# Altium PCB WIFI0320DD.PCBDOC (part 1 of 3)
Units mm, origin at the board's own origin, x right, y up, seen from the top; angles counter-clockwise.
Board outline 65.79 x 83.95 mm, 2 copper layers (Top Layer, Bottom Layer); 37 components, 30 nets, 200 pads, 45 vias.
Unrouted connection lines stored in the file: 2.
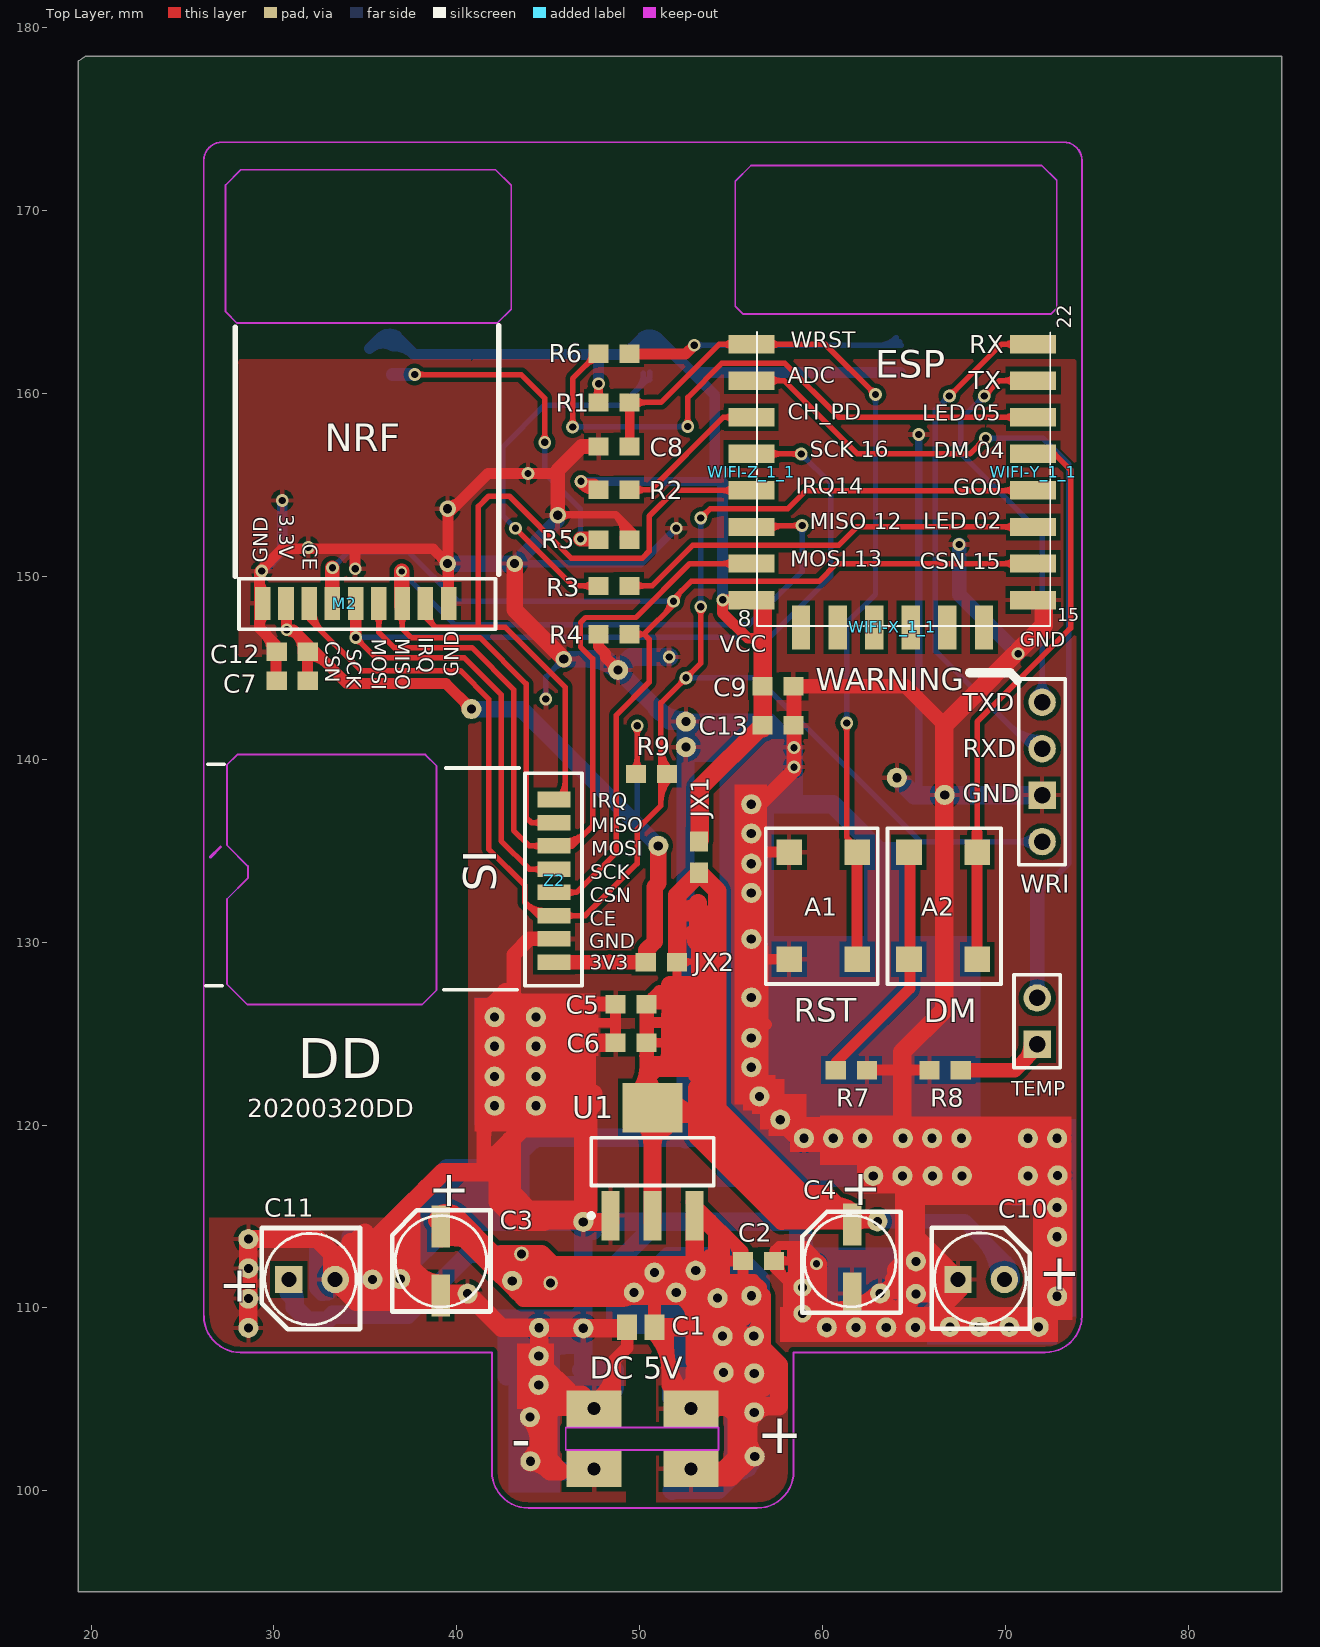
[diagram p0: Top Layer view]
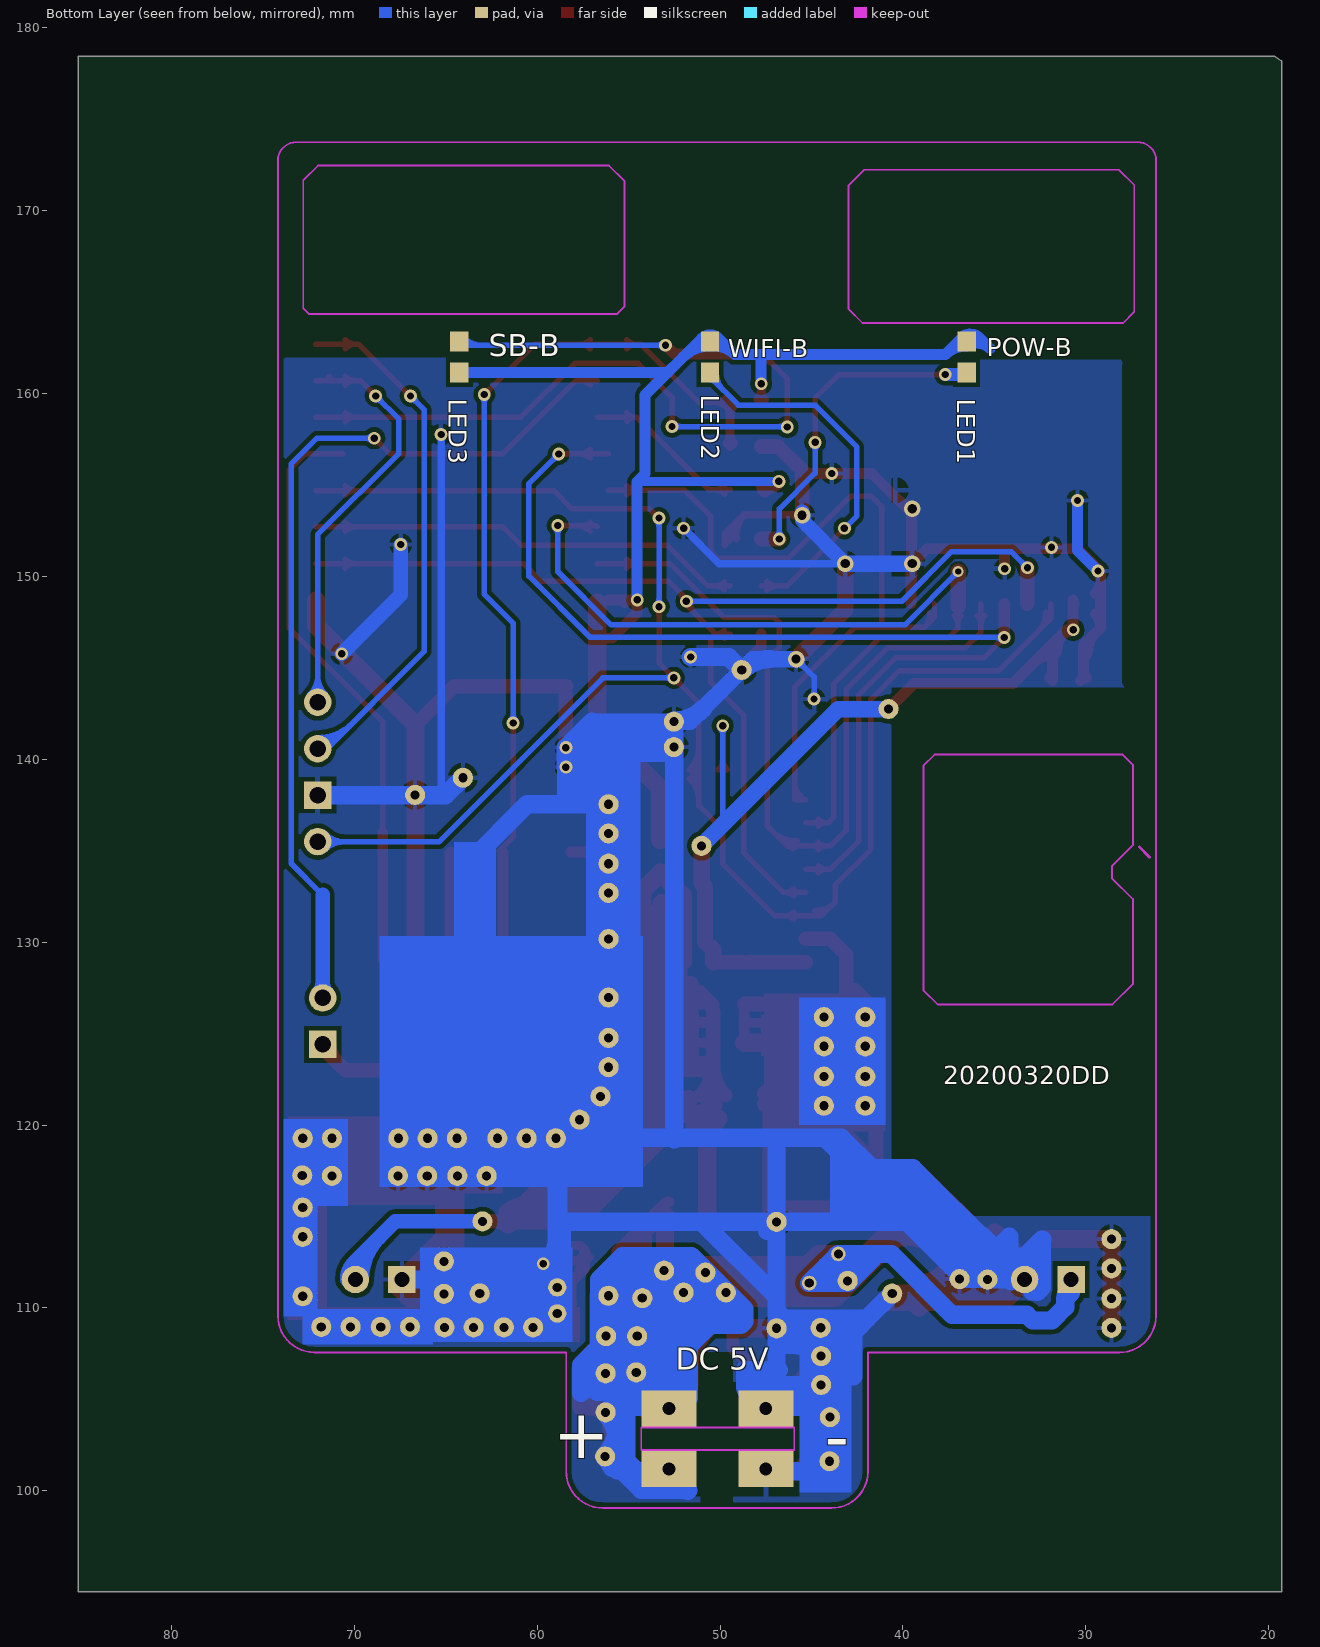
[diagram p1: Bottom Layer view, seen from below]

## Layer stack, top to bottom
Top Layer: signal copper 0.0356
Dielectric: dielectric 0.32, FR-4, Dk 4.8
Bottom Layer: signal copper 0.0356

## Board outline
19.685,178.435 85.09,178.435 85.09,94.488 19.304,94.488 19.304,178.181

## Design rules (kind name [scope] priority, off if disabled: settings)
Clearance [All] p1: gap=0.254
FabricationTestPointUsage TestPointUsage [All] p1: valid=0 allowmultiple=FALSE
FabricationTestpoint Testpoint [All] p1: side=3 testpointundercomponent=TRUE minsize=1.016 maxsize=2.54 preferedsize=1.524 minholesize=0 maxholesize=1.016 preferedholesize=0.813 testpointgrid=0.025 allowsidetop=TRUE allowsidebottom=TRUE usegrid=TRUE gridtolerance=0
PolygonConnect [All] p1: connectstyle=Relief reliefconductorwidth=0.254 reliefentries=4 polygonreliefangle="90 Angle"
RoutingVias [All] p1: holewidth=0.46 width=0.7 viastyle="Through Hole" minholewidth=0.4 minwidth=0.7 maxholewidth=0.8 maxwidth=1
SilkscreenOverComponentPads [All] p1: minsilkscreentomaskgap=0.254
SolderMaskExpansion [All] p1: expansion=0.102
Width Width_1 [InNet('3.3V')] p1: maxlimit=1 minlimit=0.254 preferedwidth=0.5 minimp=50.000000 maximp=50.000000 favimp=50.000000
Width Width_7 [InNet('3V3')] p2: maxlimit=1 minlimit=0.254 preferedwidth=0.39 minimp=50.000000 maximp=50.000000 favimp=50.000000
Width Width_4 [InNet('GND')] p3: maxlimit=1 minlimit=0.254 preferedwidth=0.6 minimp=50.000000 maximp=50.000000 favimp=50.000000
Width Width_3 [InNet('5V')] p4: maxlimit=1 minlimit=0.254 preferedwidth=1 minimp=50.000000 maximp=50.000000 favimp=50.000000
Width [All] p5: maxlimit=1 minlimit=0.254 preferedwidth=0.3 minimp=50.000000 maximp=50.000000 favimp=50.000000
25 further rules are at their usual default settings.

## Components (designator, comment, footprint, x,y, rotation, side; value= is the part's Value field where it differs from the comment)
A1 "WRST" HDR2X2 60.706,132.41 r90 top locked
A2 "WRST" HDR2X2 67.259,132.41 r90 top locked
C1 "10uf" C0805 50.063,108.941 r0 top (schematic designator C6)
C2 "0.1uf" CR1608-0603 56.5,112.573 r0 top (schematic designator C3)
C3 "220uf" CC3216-1206 39.5,113.9 r270 top locked (schematic designator C6)
C4 "220uf" CC3216-1206 62,114 r270 top locked (schematic designator C3)
C5 "10uf" CR1608-0603 49.53,126.6 r180 top locked
C6 "0.1uf" CR1608-0603 49.53,124.5 r180 top (schematic designator C4)
C7 "0.01uf" CR1608-0603 31,145.872 r0 top
C8 "0.1uf" CR1608-0603 48.6,157.1 r180 top
C9 "0.1" CR1608-0603 57.556,143.993 r0 top
C10 "220uf" HDR1X2#1 67.4,111.557 r0 top locked (schematic designator C6)
C11 "220uf" HDR1X2#1 30.81,111.557 r0 top locked (schematic designator C6)
C12 "0.01uf" CR1608-0603 31,144.297 r0 top
C13 "0.01uf" CR1608-0603 57.556,141.859 r0 top
JX1 "" CR1608-0603 53.238,134.645 r270 top (schematic designator C4)
JX2 "" CR1608-0603 51.181,128.905 r180 top (schematic designator C4)
LED1 "POW-B" CR1608-0603 36.52,162 r90 bottom locked
LED2 "WIFI-B" CR1608-0603 50.55,162 r90 bottom
LED3 "SB-B" CR1608-0603 64.26,162 r270 bottom
M2 "NRF24L01" MHDR1X8#1 38.278,148.513 r180 top locked
R1 "10K" CR1608-0603 48.6,159.512 r180 top
R2 "10K" CR1608-0603 48.6,154.737 r180 top
R3 "470" CR1608-0603 48.6,149.479 r0 top
R4 "10K" CR1608-0603 48.6,146.837 r0 top
R5 "470" CR1608-0603 48.6,152 r0 top
R6 "470" CR1608-0603 48.6,162.179 r0 top
R7 "4.7K" CR1608-0603 61.57,123 r180 top
R8 "4.7K" CR1608-0603 66.7,123 r180 top
R9 "10K" CR1608-0603 50.648,139.192 r0 top
TEMP "" HDR1X2#2 71.73,124.409 r90 top
U1 "AMS1117-3.3" SOT223_M 50.698,118 r90 top locked (schematic designator U4)
WIFI-X_1_1 "" MHDR1X8#2 59.359,147.215 r0 top
WIFI-Y_1_1 "" MHDR1X8#3 71.504,162.695 r270 top
WIFI-Z_1_1 "" MHDR1X8#4 56.106,162.691 r270 top locked
Z2 "SI" MHDR1X8#1 45.314,137.8 r270 top
? "" HDR1X4 72,135.5 r90 top

## Footprints (in the part's own frame and the unit in brackets; to place one, negate y for a bottom-side part, rotate by r counter-clockwise, add the part's x,y. Pads: shape width x height; smd on the part's side, far side on the other; paste and mask are expansions set on the pad)
C0805 [mm] "Chip Capacitor, Body 2.0x1.3mm, IPC High Density"
  rect 1.1x1.4 smd: 1(-0.75,0) 2(0.75,0)
  body extent -1.1,-0.72 1.1,0.72, height 1.4
CC3216-1206 [mm]
  rect 2.3x1 smd: 1(-0.562,-0.386) 2(3.213,-0.386)
CR1608-0603 [mm]
  rect 1.1x1 smd: 1(-0.85,0) 2(0.85,0)
HDR1X2#1 [mm]
  rect 1.5x1.5 hole 0.82: 1(0,0)
  round 1.5 hole 0.82: 2(2.54,0)
HDR1X2#2 [mm] "Connector; Header; 2 Position"
  rect 1.5x1.5 hole 0.9: 1(0,0)
  round 1.5 hole 0.9: 2(2.54,0)
  silkscreen extent -1.27,-1.27 3.81,1.27
HDR1X4 [mm] "Connector; Header; 4 Position"
  round 1.5 hole 0.9: 1(0,0) 3(5.08,0) 4(7.62,0)
  rect 1.5x1.5 hole 0.9: 2(2.54,0)
  silkscreen extent -1.27,-1.27 8.89,1.27
HDR2X2 [mm] "Connector; Header; 2x2 Position"
  rect 1.4x1.4 smd: 1(-3.344,-1.186) 2(-3.344,2.54) 3(2.508,-1.186) 4(2.508,2.54)
  silkscreen extent -4.7,-2.31 3.81,3.81
MHDR1X8#1 [mm] "Connector; Header; 8 Position"
  rect 0.85x1.8 smd: 1(0,0) 2(1.27,0) 3(2.54,0) 4(3.81,0) 5(5.08,0) 6(6.35,0) 7(7.62,0) 8(8.89,0)
  silkscreen extent -3.84,-1.37 10.19,1.4
MHDR1X8#2 [mm] "Connector; Header; 8 Position"
  rect 1x2.4 smd: 9(-0.54,0) 10(1.46,0) 11(3.46,0) 12(5.46,0) 13(7.46,0) 14(9.46,0)
MHDR1X8#3 [mm] "Connector; Header; 8 Position"
  rect 1x2.5 smd: 15(13.993,0) 16(11.993,0) 17(9.993,0) 18(7.993,0) 19(5.993,0) 20(3.993,0) 21(1.993,0) 22(0,0)
MHDR1X8#4 [mm] "Connector; Header; 8 Position"
  rect 1x2.5 smd: 1(0,0) 2(1.989,0) 3(3.989,0) 4(5.989,0) 5(7.989,0) 6(9.989,0) 7(11.989,0) 8(13.99,0)
SOT223_M [mm] "SOT223, 4-Leads, Body 6.5x3.5mm, Pit"
  rect 2.7x1 smd: 1(-2.95,2.3) 2(-2.95,0) 3(-2.95,-2.3)
  rect 2.7x3.3 smd: 4(2.95,0)
  silkscreen extent -3.07,-3.35 1.3,3.47, body extent -1.85,-3.35 1.85,3.35, height 1.7

## Part data
C1: library part Res3, "Resistor"
C2 C6 JX1 JX2: library part Ca
C10 C11: library part "Cap Pol1", "Polari"
U1: library part QNPN, "NPN Bipolar Transistor"

## Free pads (board coordinates)
  rect 0.85x1.8 smd: 0(39.55,148.513)
  rect 3x2 hole 0.7: 1(47.5,101.2) 1(47.5,104.5) 1(52.8,101.2) 1(52.8,104.5)
  round 1.1 hole 0.5: 5(35.382,111.557) 5(36.906,111.582) 5(40.589,110.787) 5(44.475,105.791) 5(44.475,107.366) 5(44.499,108.915) 5(62.992,114.732) 5(63.144,110.795) 5(65.1,110.769) 6(28.6,110.514) 6(28.6,113.765) 6(40.792,142.748) 6(42.062,122.655) 6(42.062,125.907) 6(44.323,122.655) 6(44.323,125.907) 6(46.914,108.89) 6(46.914,114.706) 6(51.016,135.268) 6(52.527,140.665) 6(56.1,124.764) 6(56.1,130.174) 6(56.1,132.691) 6(56.1,135.942) 6(60.225,108.941) 6(62.179,119.278) 6(62.765,117.221) 6(63.476,108.941) 6(65.1,112.549) 6(66.016,117.221) 6(66.675,138.049) 6(66.956,108.966) 6(67.589,119.278) 6(70.207,108.966) 6(71.221,117.221) 6(72.821,119.278) 6(72.822,115.493) 7(28.6,108.914) 7(28.6,112.165) 7(42.062,121.055) 7(42.062,124.307) 7(44.323,121.055) 7(44.323,124.307) 7(48.819,144.882) 7(52.527,142.062) 7(56.1,123.164) 7(56.1,134.291) 7(56.1,137.542) 7(60.579,119.278) 7(61.825,108.941) 7(64.059,138.99) 7(64.365,117.221) 7(65.076,108.941) 7(65.989,119.278) 7(67.616,117.221) 7(68.556,108.966) 7(71.221,119.278) 7(71.807,108.966) 7(72.822,110.641) 7(72.822,113.893) 7(72.847,117.246) 8(43.028,111.481) 8(43.993,104.032) 8(44.018,101.619) 8(49.682,110.846) 8(50.8,111.938) 8(51.994,110.846) 8(53.061,112.039) 8(54.254,110.541) 8(54.534,108.458) 8(54.585,106.477) 8(56.1,126.974) 8(56.109,110.668) 8(56.236,108.458) 8(56.261,104.292) 8(56.261,106.426) 8(56.286,101.879) 8(56.54,121.564) 8(57.683,120.294) 8(58.979,119.278) 8(64.389,119.278)
  round 0.8 hole 0.5: 5(43.534,112.954) 5(45.124,111.363)
  round 1 hole 0.5: 5(58.903,109.703) 5(58.903,111.125)

## Via types
v1: diameter 0.7, hole 0.4, Top Layer to Bottom Layer, 39 vias
v2: diameter 0.9, hole 0.5, Top Layer to Bottom Layer, 5 vias
v3: diameter 0.6, hole 0.35, Top Layer to Bottom Layer, 1 vias

## Nets (pads, with @x,y where several pads share a name; then routed paths per layer and width w, separated by ;. In a path a pad name is that pad's centre, name@x,y a point inside that pad or via, vN(x,y) a via of type N, cw(c..) or ccw(c..) an arc to the next point about the centre after c; other vN are vias at no path point)
3V: 
3V3: C4.1 C5.1 C6.1 C7.2 C9.1 C10.2 C12.2 C13.1 JX1.1 JX1.2 JX2.1 JX2.2 LED1.2 LED2.2 LED3.2 M2.7 pad.5@62.992,114.732 pad.6@40.792,142.748 pad.6@51.016,135.268 R1.2 R2.2 R9.1 U1.2 U1.4 WIFI-Z_1_1.8 Z2.8 | length 326.9
  Top Layer w0.3: R9.1@49.6,139.439 ccw(c48.972,140.067) 49.86,140.067 ; v1@49.719,141.692 cw(c49.377,141.351) 49.86,141.351 cw(c50.343,141.351) v1@50.002,141.692 ; R9.1@49.86,139.255 v1(49.86,141.834) ; 49.86,140.007 ccw(c50.662,140.007) R9.1@50.095,139.439 ; C5.1@50.421,126.467 51.343,126.467 ; C5.1@50.678,126.353 cw(c50.953,126.077) 50.953,126.467 ; C5.1@50.712,126.807 ccw(c51.384,127.3) 51.384,126.467 51.343,126.467 ; 51.277,126.533 51.146,126.533 50.729,126.949 51.343,126.949 ; 51.343,125.894 51.343,126 ; 51.343,127.178 51.343,126.949 ; 51.664,123.971 51.765,123.971 52.003,123.971 ; 51.756,126 51.664,126 51.343,126 ; JX2.1@51.905,129.208 ccw(c51.55,129.819) 52.257,129.819 JX2.1@52.257,128.94 ; 52.031,127.66 52.031,127.215 51.765,126.949 51.343,126.949 ; JX2.1@52.045,128.94 JX2.1@52.257,128.94 ; JX2.1@52.197,128.753 52.257,128.813 JX2.1@52.257,128.94 ; 52.257,127.139 52.257,127.66 ; JX2.1@52.329,128.658 cw(c53.01,127.976) 53.01,128.94 ; JX2.1@52.329,129.152 ccw(c52.842,129.666) 52.842,128.94 ; 53.328,128.94 53.289,128.94 JX2.1@52.257,128.94 ; 51.343,126 51.343,126.467 ; 51.343,126.467 51.343,126.949
  Top Layer w0.39: 50.164,123.784 cw(c49.644,123.264) 50.38,123.264 cw(c51.116,123.264) 50.596,123.784 ; C13.1@56.541,142.075 ccw(c56.079,142.536) 56.732,142.536 ; C9.1@56.541,143.777 cw(c56.079,143.316) 56.732,143.316 ; C9.1@56.541,144.208 ccw(c56.079,144.67) 56.732,144.67 ; 56.706,145.213 56.706,146.618 56.706,148.577 WIFI-Z_1_1.8@56.706,148.701 ; 56.706,147.602 cw(c57.955,147.602) WIFI-Z_1_1.8@57.072,148.485 ; 56.706,145.212 56.718,145.2 56.732,145.186 C13.1@56.732,141.884 ; 56.732,142.655 ccw(c57.552,142.655) C13.1@56.972,142.075 ; 56.732,143.197 cw(c57.552,143.197) C9.1@56.972,143.777 ; 56.732,144.788 ccw(c57.552,144.788) C9.1@56.972,144.208 ; C4.1@61.315,114.503 ccw(c61.036,114.448) 61.036,114.732 61.444,114.732 61.614,114.732 62.265,114.732 ; C4.1@61.904,114.469 cw(c62.265,114.353) 62.265,114.732 ; pad.5@62.712,114.514 ccw(c62.265,114.166) 62.265,114.732 ; pad.5@62.712,114.95 cw(c62.265,115.298) 62.265,114.732 ; pad.5@62.741,114.481 ccw(c62.135,113.875) 62.135,114.732 ccw(c62.135,115.589) pad.5@62.741,114.983
  Top Layer w0.5: R2.2@47.496,154.991 R2.2@47.75,154.737 ; R1.2@47.573,159.689 ccw(c47.17,160.092) 47.74,160.092 ; R1.2@47.74,159.512 v1@47.74,160.477 ; 47.74,160.139 ccw(c48.377,160.139) R1.2@47.927,159.689 ; C6.1@50.38,124.5 51.324,124.5 ; 50.405,123.535 51.349,123.535 ; C6.1@50.607,124.323 cw(c51.034,123.896) 51.034,124.5 cw(c51.034,125.104) C6.1@50.607,124.677 ; 52.031,127.66 JX2.1@52.031,128.905
  Top Layer w0.6: M2.7@30.658,148.513 M2.7@30.696,148.513 ; v1@30.696,147.029 cw(c30.696,146.049) 31.388,146.742 ; M2.7@30.696,148.704 M2.7@30.696,148.513 ; 31.135,146.996 cw(c30.011,145.872) C7.2@31.6,145.872 ; C12.2@31.838,144.297 C7.2@31.838,145.872 ; 31.838,144.809 ccw(c32.362,144.809) C12.2@31.991,144.439 ; 31.838,145.36 cw(c32.362,145.36) C7.2@31.991,145.731 ; C7.2@31.9,145.672 cw(c31.9,144.325) 32.853,145.278 ; pad.6@40.542,142.748 ccw(c39.939,142.748) 40.366,143.175 ccw(c40.792,143.602) pad.6@40.792,142.998 ; pad.6@40.792,142.748 39.395,144.145 33.985,144.145 31.071,147.059 30.715,147.059 v1(30.696,147.079) M2.7@30.696,148.513 ; 48.336,129.025 48.451,128.91 48.446,128.905 ; 50.292,125.603 50.38,125.603 51.576,125.603 ; U1.4@50.38,121.902 U1.4@50.698,120.603 ; JX2.1@52.031,128.905 JX2.1@52.041,128.905 ; v1@54.835,148.717 cw(c54.835,148.18) WIFI-Z_1_1.8@55.215,148.56 ; WIFI-Z_1_1.8@56.106,148.701 56.09,148.717 v1(54.534,148.717) 54.534,147.997 55.912,146.618 56.706,146.618 ; WIFI-Z_1_1.8@56.651,148.632 56.706,148.577 WIFI-Z_1_1.8@56.718,148.565 ; C9.1@56.706,143.993 56.706,145.212 56.706,146.618
  Top Layer w0.7: 47.085,154.965 cw(c47.212,155.439) v1(46.787,155.194) ; R2.2@47.277,154.991 cw(c47.277,155.685) v1(46.787,155.194) ; R2.2@47.496,154.991 v1@46.99,154.991 ; R2.2@47.571,154.66 ccw(c46.99,154.315) v1@46.99,154.991 ; R2.2@47.638,154.873 cw(c47.399,155.399) v1@46.99,154.991 ; R2.2@47.682,154.886 cw(c47.55,155.958) v1(46.787,155.194) ; C5.1@50.38,126.6 50.729,126.949 51.085,127.305 51.943,127.305 ccw(c51.943,125.689) C5.1@50.559,126.523 ; v1(46.787,155.194) v1@46.99,154.991
  Top Layer w0.8: Z2.8@45.314,128.91 48.336,128.91 ; 48.446,128.905 JX2.2@50.368,128.905 ; U1.4@49.727,121.622 ccw(c48.149,123.199) 50.38,123.199 ; U1.4@50.38,121.902 50.38,122.494 ; 50.38,123.288 ccw(c52.736,123.288) U1.4@51.07,121.622 ; C5.1@50.38,126.215 50.38,125.603 C6.1@50.38,124.5 50.38,123.199 ; C4.1@61.614,114.562 C4.1@61.614,114.732 ; pad.5@62.992,114.732 62.265,114.732 ; 50.38,122.494 50.902,123.016 52.581,123.016 53.137,123.571 53.264,123.698 ; 50.38,122.494 50.38,123.199 ; 53.264,123.698 53.264,123.952 53.467,124.155 53.594,124.028 53.264,123.698 ; 62.265,114.732 ccw(c62.265,113.911) 61.685,114.491 cw(c62.265,113.911) 62.265,114.732
  Top Layer w0.9: JX2.2@50.368,128.905 50.368,129.565 50.825,130.023 50.825,133.02 51.016,133.21 pad.6@51.016,135.268
  Top Layer w1: U1.4@50.097,120.349 cw(c48.646,118.898) 50.698,118.898 cw(c52.75,118.898) U1.4@51.299,120.349 ; U1.4@50.38,121.146 U1.4@50.876,120.65 ; U1.2@50.698,114.703 50.698,120.603 U1.4@51.384,120.603 ; U1.4@51.206,120.625 53.137,120.625 ; U1.4@51.384,119.888 U1.4@51.384,120.328 ; 51.638,123.749 51.664,123.774 ; 51.664,126 51.664,123.971 51.664,123.774 ; 51.664,127.66 52.031,127.66 52.257,127.66 53.264,127.66 ; U1.4@51.716,121.406 ccw(c53.137,122.307) 53.137,120.625 ; 51.765,126.949 51.765,123.971 51.765,123.876 51.664,123.774 ; JX2.1@52.045,128.94 52.045,132.563 JX1.2@53.238,133.756 ; 52.502,123.495 52.502,126.467 ; 52.578,126.902 52.705,126.775 ; 52.603,131.623 52.807,131.826 ; 52.68,127.279 52.934,127.533 ; 52.959,130.48 53.111,130.327 cw(c54.186,130.327) 53.835,131.343 ; 53.137,122.03 53.137,120.625 ; 53.188,130.023 53.188,130.073 ; 53.188,132.131 53.188,130.073 ; 53.264,123.698 54.242,122.72 ; JX1.2@53.277,133.795 JX1.2@53.258,133.776 ; JX1.1@53.277,135.585 53.277,138.43 C13.1@56.732,141.884 ; 53.289,121.196 53.289,122.758 ; 53.315,119.888 53.315,120.752 ; 53.391,122.758 53.289,122.758 ; 53.391,131.623 53.391,129.769 53.289,129.87 ; JX1.2@53.391,133.604 JX1.2@53.238,133.756 ; 53.594,124.028 53.594,128.956 ccw(c52.088,130.462) 54.218,130.462 ; 53.746,119.99 54.242,119.494 ; 56.236,116.484 57.937,114.783 61.835,114.783 C4.1@61.614,114.562 ; C13.1@56.718,141.693 56.718,145.2 WIFI-Z_1_1.8@56.718,148.565 ; 57.226,115.545 60.631,115.545 ; 57.772,114.77 53.137,119.405 53.137,120.625 ; 60.794,115.552 ccw(c61.614,116.371) C4.1@61.614,115.212 ; 61.081,114.783 cw(c61.081,114.03) C4.1@61.614,114.562 ; C4.1@61.614,114.732 60.115,116.23 58.89,116.23 ; 53.188,130.073 53.086,130.073 53.289,129.87 ; 53.188,130.073 53.289,130.073 53.289,129.87 ; JX1.2@53.238,133.756 JX1.2@53.238,133.795 JX1.2@53.258,133.776 ; JX1.2@53.238,133.756 JX1.2@53.258,133.776 ; JX1.2@53.258,133.776 54.242,132.792 54.242,122.72 ; 53.289,122.758 53.137,122.758 53.137,123.571 53.137,127.279 53.289,127.432 53.289,128.94 53.289,129.87 ; 54.242,119.494 54.242,120.879 ; 54.242,119.494 57.506,116.23 58.89,116.23 ; 54.242,120.879 58.89,116.23 ; 54.242,120.879 54.242,122.72 ; 60.631,115.545 ccw(c61.459,116.372) C4.1@61.614,115.212 ; 60.631,115.545 61.444,114.732 C4.1@61.614,114.562 ; C4.1@61.614,115.212 ccw(c60.811,114.409) 60.811,115.545 cw(c60.811,114.409) C4.1@61.614,115.212
  Bottom Layer w0.3: v1@49.719,141.692 cw(c49.377,141.351) 49.86,141.351 cw(c50.343,141.351) v1@50.002,141.692 ; v1(49.86,141.834) 49.86,136.423 pad.6@51.016,135.268
  Bottom Layer w0.39: C10.2@69.693,111.804 69.693,111.811 C10.2@69.698,111.811
  Bottom Layer w0.5: v1(46.787,155.194) 54.534,155.194
  Bottom Layer w0.6: v1@30.683,147.066 v1(30.696,147.079) v1@30.709,147.091 ; 35.792,163.021 cw(c36.339,162.474) LED1.2@36.714,163.15 ; 35.917,162.95 cw(c35.917,162.297) LED1.2@36.379,162.759 ; LED1.2@36.423,162.625 ccw(c35.937,161.751) 35.23,162.458 35.721,162.95 36.855,162.95 37.677,162.128 ; LED1.2@36.522,162.6 cw(c36.538,160.989) 37.677,162.128 ; v1@47.752,160.477 47.752,162.041 ; LED2.2@50.092,163.021 cw(c50.528,162.585) LED2.2@50.591,163.198 ; LED2.2@50.53,162.601 ccw(c50.362,160.966) 49.2,162.128 ; LED2.2@50.55,162.6 cw(c50.55,160.499) 52.036,161.985 ; LED2.2@50.55,163.2 cw(c50.55,162.547) LED2.2@51.012,163.009 ; 52.857,161.15 LED3.2@64.26,161.15 ; v1(54.534,148.717) 54.534,155.169 54.102,155.6 54.102,159.918 51.003,163.017 50.089,163.017 49.2,162.128 ; 37.677,162.128 49.2,162.128
  Bottom Layer w0.8: pad.5@62.992,114.732 67.767,114.732 69.94,112.559 C10.2@69.94,111.557 ; 68.634,113.865 cw(c66.326,111.557) C10.2@69.59,111.557 ; C10.2@69.693,111.804 ccw(c69.095,112.402) 69.94,112.402 ccw(c70.785,112.402) C10.2@70.188,111.804 ; 70,112.499 cw(c69.057,111.557) C10.2@70.39,111.557
  Bottom Layer w0.9: pad.6@40.792,142.748 43.536,142.748 pad.6@51.016,135.268
  other v1: 47.752,160.528
5V: C1.2 C2.1 C3.1 C11.1 pad.1@52.8,101.2 pad.1@52.8,104.5 pad.5@43.534,112.954 pad.5@45.124,111.363 pad.8@43.028,111.481 pad.8@49.682,110.846 pad.8@50.8,111.938 pad.8@51.994,110.846 pad.8@53.061,112.039 pad.8@54.254,110.541 pad.8@54.534,108.458 pad.8@54.585,106.477 pad.8@56.109,110.668 pad.8@56.236,108.458 pad.8@56.261,104.292 pad.8@56.261,106.426 pad.8@56.286,101.879 U1.3 | length 541.8
  Top Layer w0.5: 53.848,112.395 53.899,112.446 53.975,112.522 53.975,112.598 53.975,114.427 ; 54.178,111.709 54.356,111.887 ; 54.28,113.335 54.356,113.259 54.356,112.573 54.356,111.887 ; 54.635,111.836 54.521,111.722 ; 54.686,111.912 54.686,112.573 54.686,113.411 ; 54.712,113.69 54.712,113.767 ; 55.829,111.481 55.702,111.608 ; pad.8@56.015,110.953 ccw(c55.891,111.328) 56.286,111.328 ; 54.356,111.887 54.458,111.785 54.521,111.722 ; 54.521,111.722 54.635,111.608 ; 54.521,111.722 54.407,111.608 54.635,111.608 ; 54.635,111.608 55.65,111.608 55.702,111.608 ; 55.702,111.608 56.007,111.608 ; 56.007,111.608 56.261,111.608 56.718,111.15 56.718,110.768 56.63,110.68 56.286,111.023 56.286,111.328 ; 56.007,111.608 56.286,111.328
  Top Layer w0.6: U1.3@52.792,115.787 cw(c52.834,115.466) U1.3@53.063,115.695 ; U1.3@52.87,115.192 cw(c53.032,113.939) 53.925,114.832 ; U1.3@52.947,114.597 cw(c53.23,112.413) 54.788,113.97 ; pad.8@53.034,111.997 53.45,111.997 53.467,112.014 53.67,112.217 ; pad.8@53.162,112.268 ccw(c53.413,112.83) 53.848,112.395 53.67,112.217 ; U1.3@53.251,115.506 55.65,113.108 C2.1@55.65,112.573 ; 53.746,112.827 53.848,112.725 53.975,112.598 54.013,112.56 ; 53.772,112.573 53.848,112.497 53.899,112.446 54.127,112.217 ; 53.975,112.522 54.013,112.56 ; 54.026,112.547 54.013,112.56 ; pad.8@54.134,110.76 ccw(c53.668,111.608) 54.635,111.608 ; 54.458,111.785 54.458,112.293 ; 54.635,111.023 54.635,111.277 ; 54.635,112.09 54.635,111.836 54.635,111.608 ; 54.635,113.767 54.686,113.767 ; 54.813,113.589 54.839,113.614 ; 54.845,113.913 cw(c53.505,112.573) C2.1@55.4,112.573 ; 54.927,111.316 55.093,111.481 55.65,111.481 ; C2.1@55.575,112.928 C2.1@55.575,112.573 ; 55.702,109.31 cw(c57.186,109.31) pad.8@56.264,110.472 ; 55.702,111.608 55.702,111.481 ; C2.1@55.753,112.434 C2.1@55.753,112.573 ; pad.8@55.859,110.67 ccw(c55.146,110.676) 55.65,111.18 ; pad.8@55.86,110.691 ccw(c55.316,110.742) 55.702,111.128 ; pad.8@55.896,110.537 cw(c55.054,110.02) 55.752,109.322 ; pad.8@56.143,110.915 cw(c56.22,111.481) 55.65,111.481 ; pad.8@56.161,110.912 cw(c56.283,111.481) 55.702,111.481 ; 56.29,109.859 ccw(c55.72,110.429) pad.8@56.407,110.851 ; 56.63,110.2 55.752,109.322 ; 53.67,112.217 cw(c53.453,112.434) 53.237,112.217 ccw(c53.453,112.434) 53.67,112.217 ; 54.013,112.56 54.026,112.573 54.356,112.573 54.686,112.573 C2.1@55.575,112.573 ; 54.635,111.277 cw(c54.14,111.277) 54.216,110.788 ccw(c54.14,111.277) 54.635,111.277 ; 54.635,111.277 54.635,111.608 ; C2.1@55.575,112.573 C2.1@55.65,112.573 ; C2.1@55.575,112.573 55.397,112.751 C2.1@55.65,112.573 ; 55.65,111.18 55.65,111.481 ; 55.65,111.18 55.702,111.128 ; 55.65,111.481 55.702,111.481 ; 55.65,111.481 55.65,111.608 C2.1@55.65,112.573 ; 55.702,111.128 55.702,111.481 ; 55.702,111.128 55.702,110.211 55.702,109.372 55.752,109.322 ; 55.708,110.217 cw(c56.159,109.816) 56.123,110.418 ccw(c56.159,109.816) 55.708,110.217 ; 55.708,110.217 ccw(c55.257,110.618) 55.859,110.653 cw(c55.257,110.618) 55.708,110.217
  Top Layer w0.7: C1.2@50.672,108.649 cw(c48.585,106.562) 51.537,106.562 ; C1.2@50.813,108.941 50.813,110.667 ; C1.2@51.167,109.144 cw(c50.275,108.252) 51.537,108.252 ; 51.537,106.222 ccw(c54.022,106.222) pad.1@52.265,104.465 ; 51.537,107.912 ccw(c55.712,107.912) pad.1@52.76,104.96 ; 51.537,108.941 51.537,105.763 ; pad.1@51.711,104.775 ccw(c50.918,105.145) 51.537,105.763 ; pad.1@52.8,104.5 51.537,105.763
  Top Layer w1: C3.1@38.911,114.791 cw(c39.305,112.892) 40.676,114.264 ; C3.1@39.091,114.986 39.954,114.986 ; C3.1@39.114,113.812 cw(c39.755,110.723) 41.986,112.954 ; C3.1@39.114,114.462 C3.1@39.513,114.462 ; C3.1@39.114,115.112 cw(c39.449,114.48) 39.954,114.986 ; C3.1@39.116,113.97 40.259,113.97 41.275,112.954 ; 42.443,112.954 42.469,112.954 ; 42.465,111.764 ccw(c43.028,112.326) pad.8@43.028,111.531 ; pad.8@42.978,111.486 ccw(c41.21,111.695) 42.469,112.954 ; pad.8@43.028,111.431 cw(c43.028,109.102) 44.674,110.749 ; pad.8@43.078,111.481 ccw(c43.873,111.481) 43.311,110.918 ; pad.5@43.434,112.954 ccw(c45.763,112.954) 44.116,111.307 ; 43.477,111.945 ccw(c45.124,113.593) pad.5@45.124,111.263 ; pad.5@43.594,112.874 cw(c43.077,113.562) 42.469,112.954 ; pad.5@45.202,111.3 cw(c43.663,112.548) 43.663,110.566 ; 46.563,110.667 cw(c46.563,112.801) 45.054,111.292 ccw(c46.807,113.046) 46.807,110.566 ; 48.312,111.363 cw(c48.312,109.476) pad.8@49.647,110.81 ; 48.887,110.566 ccw(c48.887,111.641) 49.647,110.881 cw(c49.131,111.397) 49.131,110.667 ; 49.292,111.363 ccw(c49.292,113.446) pad.8@50.765,111.973 ; pad.8@49.641,110.873 cw(c49.073,111.245) 49.073,110.566 ; pad.8@49.679,110.796 ccw(c49.63,110.009) 49.073,110.566 ; 49.698,112.344 cw(c49.698,110.836) pad.8@50.765,111.902 ; pad.8@49.718,110.81 cw(c51.052,109.476) 51.052,111.363 ; pad.8@49.718,110.881 ccw(c50.233,111.397) 50.233,110.667 ; pad.8@49.732,110.849 cw(c50.495,110.894) 50.297,111.632 ; 50.624,111.363 cw(c50.624,109.476) pad.8@51.958,110.81 ; C1.2@50.813,108.941 51.537,108.941 53.01,108.941 ; 50.813,111.143 50.813,110.667 ; pad.8@50.835,111.902 cw(c51.902,110.836) 51.902,112.344 ; pad.8@50.835,111.973 ccw(c52.308,113.446) 52.308,111.363 ; 51.307,111.363 ccw(c51.307,113.793) pad.8@53.025,112.075 ; 51.336,111.624 cw(c51.123,110.831) pad.8@51.944,110.845 ; 51.443,110.667 ccw(c51.443,111.397) pad.8@51.958,110.881 ; pad.8@51.979,110.798 cw(c51.559,109.409) 53.01,109.409 ; pad.8@51.994,110.796 cw(c51.994,108.651) 53.51,110.168 ; pad.8@52.018,110.802 cw(c52.426,110.083) 53.01,110.667 ; pad.8@52.029,110.881 ccw(c52.545,111.397) 52.545,110.667 ; pad.8@52.036,110.819 cw(c53.01,110.219) 53.01,111.363 ; 52.204,112.344 cw(c52.204,111.183) pad.8@53.025,112.004 ; pad.1@52.376,105.024 52.299,105.024 52.299,104.5 pad.1@52.8,104.5 ; pad.1@52.446,104.854 ccw(c51.085,106.215) 53.01,106.215 ; pad.1@52.49,104.892 ccw(c51.637,105.969) 53.01,105.969 ; pad.1@52.511,105.126 52.511,105.131 52.629,105.131 52.553,105.207 52.534,105.207 pad.1@52.534,105.138 ; pad.1@52.8,104.6 pad.1@52.83,104.6 ; U1.3@52.998,115.05 53.352,115.05 53.975,114.427 54.635,113.767 ; U1.3@53.01,114.173 pad.8@53.01,112.014 ; U1.3@53.02,115.087 U1.3@53.289,115.087 ; pad.8@53.034,111.997 cw(c52.326,110.855) 53.67,110.855 ; 53.035,111.363 53.01,111.363 ; pad.8@53.089,111.998 cw(c53.656,111.187) 54.356,111.887 ; 53.248,108.941 cw(c53.248,107.172) 54.498,108.423 cw(c52.757,106.682) 55.22,106.682 ; 53.289,109.296 53.67,108.941 ; pad.1@53.631,104.875 ccw(c54.042,105.342) 54.483,104.902 ; 53.67,106.274 cw(c56.688,106.274) 54.569,108.422 ccw(c55.39,107.601) 54.229,107.601 ; 53.67,108.805 ccw(c56.913,108.805) 54.62,106.512 cw(c55.564,107.456) 54.229,107.456 ; 53.67,109.01 cw(c55.785,109.01) pad.8@54.29,110.505 ; 53.67,112.217 53.67,112.014 ; pad.1@53.782,104.368 cw(c54.483,104.175) 54.483,104.902 ; pad.1@53.788,104.393 cw(c54.864,104.156) 54.864,105.258 ; 53.848,112.725 53.848,112.497 53.848,112.395 54.356,111.887 ; pad.8@54.21,110.564 cw(c53.01,111.177) 53.01,109.83 ; pad.8@54.216,110.509 ccw(c53.67,110.068) 53.67,110.769 ; pad.8@54.224,110.581 cw(c53.667,111.324) 53.01,110.667 ; 54.229,109.315 ccw(c55.39,109.315) pad.8@54.569,108.493 ; pad.8@54.274,110.495 cw(c54.775,109.284) 55.702,110.211 ; pad.8@54.289,110.577 cw(c55.648,112.014) 53.67,112.014 ; pad.8@54.29,110.576 ccw(c55.172,111.459) 55.172,110.211 ; pad.8@54.304,110.541 ccw(c55.284,110.541) 54.591,109.848 ; pad.8@54.489,108.436 ccw(c53.67,108.024) 53.67,108.941 ; pad.8@54.49,108.481 ccw(c53.188,109.169) pad.8@54.229,110.211 ; pad.8@54.549,106.512 ccw(c52.931,108.131) 55.22,108.131 ; pad.8@54.553,108.504 cw(c55.107,109.83) 53.67,109.83 ; pad.8@54.58,106.527 cw(c54.406,108.457) 53.035,107.086 ; pad.8@54.585,106.427 cw(c54.585,105.202) 55.45,106.068 ; pad.8@54.585,106.527 ccw(c54.585,107.874) 55.537,106.921 ; 54.597,101.13 cw(c56.286,99.44) pad.8@56.286,101.829 ; pad.8@54.603,106.43 cw(c54.81,105.89) 55.22,106.299 ; pad.8@54.631,106.457 ccw(c55.637,106.03) 54.864,105.258 ; 54.884,110.211 ccw(c54.884,111.892) pad.8@56.073,110.703 ; 55.055,111.188 54.927,111.316 54.762,111.15 ; 55.22,106.344 cw(c57.799,106.344) pad.8@56.265,108.418 ; 55.296,101.841 cw(c58.712,101.841) pad.8@56.296,104.257 ; 55.569,104.629 ccw(c56.261,105.322) pad.8@56.261,104.342 ; 55.571,104.627 ccw(c53.998,106.2) pad.8@56.211,106.421 ; 55.702,111.128 56.63,110.2 ; pad.8@55.728,108.509 56.718,107.518 ; 55.855,105.562 cw(c56.85,105.562) pad.8@56.289,106.385 ; 55.931,102.859 ccw(c57.266,102.859) pad.8@56.322,101.915 ; 55.931,103.375 cw(c57.179,103.375) pad.8@56.296,104.257 ; pad.8@56.073,110.632 cw(c54.639,109.198) 56.667,109.198 ; pad.8@56.101,110.717 cw(c55.855,112.243) 54.762,111.15 ; pad.8@56.2,108.493 ccw(c55.072,109.621) 56.667,109.621 ; pad.8@56.214,108.413 cw(c55.865,107.69) 56.667,107.69 ; pad.8@56.218,104.266 ccw(c55.571,103.865) 55.571,104.627 ; pad.8@56.229,106.464 ccw(c55.339,107.518) 56.718,107.518 ; pad.8@56.24,106.381 cw(c55.89,105.63) 56.718,105.63 ; pad.8@56.241,104.338 cw(c55.729,105.493) 54.836,104.6 ; pad.8@56.252,101.843 ccw(c55.781,101.343) 55.296,101.829 ; pad.8@56.286,108.458 ccw(c57.51,108.458) 56.644,107.592 ; pad.8@56.287,106.469 cw(c56.756,107.239) 55.855,107.239 ; pad.8@56.31,104.304 cw(c57.815,104.678) 56.718,105.774 ; pad.8@56.319,101.917 cw(c58.221,104.14) 55.296,104.14 ; pad.8@56.63,110.68 56.667,110.642 56.667,107.823 57.61,106.88 57.61,104.627 55.571,104.627 ; 57.19,104.627 ccw(c57.19,103.364) pad.8@56.296,104.257 ; 39.954,114.986 41.986,112.954 ; 41.275,112.954 43.663,110.566 ; 41.275,112.954 41.986,112.954 ; 42.469,112.954 44.755,110.667 48.27,110.667 ; 42.469,112.954 pad.5@43.534,112.954 ; pad.5@43.534,112.954 44.628,112.954 45.237,112.344 52.68,112.344 pad.8@53.01,112.014 ; pad.5@43.534,112.954 pad.5@45.124,111.363 47.574,111.363 ; 43.663,110.566 48.371,110.566 ; 47.574,111.363 53.01,111.363 ; 47.574,111.363 48.27,110.667 ; 48.27,110.667 pad.8@49.174,110.667 ; 48.27,110.667 48.371,110.566 ; 48.371,110.566 49.073,110.566 ; 49.073,110.566 pad.8@49.174,110.667 ; pad.8@49.174,110.667 50.813,110.667 ; 50.813,110.667 53.01,110.667 ; pad.1@52.83,104.6 53.161,104.269 53.85,104.269 pad.1@54.181,104.6 ; pad.1@52.83,104.6 pad.1@54.181,104.6 ; pad.1@52.83,104.6 52.096,105.334 52.376,105.334 53.01,105.969 ; 53.01,105.969 53.01,106.556 54.309,105.258 54.864,105.258 ; 53.01,108.941 53.67,108.941 ; 53.01,108.941 53.01,109.83 ; 53.01,108.941 53.01,107.086 53.035,107.086 ; 53.01,109.83 53.67,109.83 ; 53.01,109.83 53.01,110.667 ; 53.01,110.667 53.01,111.363 ; 53.01,110.667 53.67,110.007 ; 53.01,111.363 pad.8@53.01,112.014 ; pad.8@53.01,112.014 53.467,112.014 53.67,112.014 ; 53.035,107.086 53.67,106.451 ; 53.67,106.451 53.67,108.941 ; 53.67,106.451 54.864,105.258 ; 53.67,108.941 53.67,109.83 ; 53.67,109.83 53.848,109.83 53.67,110.007 ; 53.67,109.83 53.67,110.007 ; 53.67,110.007 53.67,110.769 ; 53.67,110.769 pad.8@54.356,110.769 ; 53.67,110.769 53.67,111.023 ; 53.67,111.023 54.28,111.633 54.356,111.557 ; 53.67,111.023 53.67,112.014 ; pad.1@54.181,104.6 54.483,104.902 ; pad.1@54.181,104.6 54.836,104.6 ; pad.8@54.229,110.211 55.702,110.211 ; pad.8@54.229,110.211 54.229,106.604 55.22,105.613 55.22,104.978 ; pad.8@54.229,110.211 54.356,110.338 pad.8@54.356,110.769 ; pad.8@54.229,110.211 55.22,109.22 ; pad.8@54.356,110.769 54.356,111.557 ; pad.8@54.356,110.769 54.381,110.769 54.635,111.023 54.762,111.15 ; 54.356,111.557 54.635,111.277 54.762,111.15 ; 54.356,111.557 54.356,111.887 ; 54.483,104.902 55.22,104.902 ; pad.8@54.532,108.508 ccw(c54.507,109.22) 55.22,109.22 ; pad.8@54.532,108.508 cw(c54.5,109.435) 53.867,108.757 ccw(c54.5,109.435) pad.8@54.532,108.508 ; 54.762,111.15 55.702,110.211 ; 54.836,104.6 55.296,104.14 ; 54.864,105.258 55.22,104.902 ; 54.864,105.258 54.94,105.258 55.22,104.978 ; 55.22,104.902 55.22,104.978 ; 55.22,104.978 55.571,104.627 ; 55.22,106.299 55.22,106.604 ; 55.22,106.299 55.855,105.664 55.855,107.239 ; 55.22,106.604 55.22,109.22 ; 55.22,106.604 55.855,107.239 ; 55.296,101.829 55.296,104.14 ; 55.296,101.829 54.559,101.092 52.822,101.092 52.8,101.07 53.134,100.736 54.966,100.736 55.931,101.702 55.931,104.267 55.571,104.627 ; 55.571,104.627 ccw(c56.258,105.314) pad.8@56.261,104.342 ; 55.571,104.627 ccw(c56.258,105.314) pad.8@56.261,104.342 ; 55.571,104.627 56.718,105.774 ; 56.718,105.774 56.718,107.518 ; 53.67,109.62 cw(c54.605,109.62) 54.272,110.494 ccw(c54.605,109.62) 53.67,109.62 ; 53.67,109.75 cw(c54.431,109.75) 54.265,110.492 ccw(c54.431,109.75) 53.67,109.75 ; 53.798,108.813 ccw(c54.534,109.549) 54.534,108.508 cw(c54.534,109.549) 53.798,108.813
  Bottom Layer w1: C11.1@30.633,111.38 cw(c29.432,110.179) 31.131,110.179 ; C11.1@30.666,111.353 cw(c30.026,110.452) 31.131,110.452 ; C11.1@30.81,111.557 30.81,110.82 31.131,110.499 ; C11.1@31.023,111.425 ccw(c31.662,111.031) 31.131,110.499 ; pad.8@43.034,111.53 cw(c43.109,112.166) 42.469,112.166 42.469,112.243 ; pad.8@43.039,111.529 cw(c43.2,112.243) 42.469,112.243 ; pad.8@43.075,111.466 cw(c44.194,111.123) 44.194,112.293 ; pad.5@43.435,112.938 ccw(c44.194,113.063) 44.194,112.293 ; pad.5@43.618,112.901 cw(c42.52,113.591) 42.52,112.293 ; 49.202,109.806 ccw(c48.163,110.846) pad.8@49.632,110.846 ; pad.8@49.682,110.896 ccw(c49.682,112.365) 50.722,111.326 ; 50.337,110.942 ccw(c49.342,111.938) pad.8@50.75,111.938 ; pad.8@50.805,111.988 ccw(c50.912,113.045) 51.664,112.293 ; pad.8@50.806,111.987 ccw(c50.932,113.05) 51.689,112.293 ; pad.8@50.81,111.987 ccw(c50.986,112.818) 51.587,112.217 51.664,112.293 ; pad.8@50.835,111.902 cw(c51.779,110.959) 51.779,112.293 ; pad.8@50.838,111.906 cw(c51.664,111.221) 51.664,112.293 ; 51.714,110.05 cw(c52.789,110.05) pad.8@52.029,110.81 ; 51.74,100.025 51.765,100 ; pad.1@51.847,104.872 cw(c52.54,104.695) pad.1@52.54,105.41 ; pad.1@51.875,100.937 cw(c51.227,100.538) 51.765,100 ; pad.1@51.891,100.913 cw(c51.341,100.526) 51.816,100.051 ; pad.8@51.952,110.874 ccw(c51.023,111.501) 51.816,112.293 ; pad.8@51.994,110.796 cw(c51.994,107.609) 54.247,109.862 ; pad.8@52.044,110.846 cw(c53.452,110.846) 52.456,111.842 ; 52.281,111.667 cw(c53.061,110.888) pad.8@53.061,111.989 ; 52.327,112.293 cw(c52.327,111.305) pad.8@53.025,112.004 ; pad.1@52.382,104.993 cw(c52.468,105.512) 51.943,105.512 ; pad.1@52.446,104.854 ccw(c51.593,105.707) 52.8,105.707 ccw(c54.007,105.707) pad.1@53.154,104.854 ; pad.1@52.503,104.957 cw(c53.045,106.172) 51.714,106.172 ; pad.1@52.8,101.2 52.8,101.07 54.69,101.07 55.245,101.625 55.245,104.267 ; pad.1@52.8,104.5 52.22,105.08 51.714,105.08 51.714,106.172 ; pad.1@52.816,104.624 cw(c53.828,104.365) pad.1@53.828,105.41 ; 52.959,109.271 51.816,109.271 51.714,109.372 ; 52.998,111.111 ccw(c54.254,112.367) pad.8@54.254,110.591 ; pad.8@53.018,112.013 ccw(c51.562,111.117) 51.562,112.827 ; pad.8@53.039,112.084 cw(c52.575,113.052) 51.816,112.293 ; pad.8@53.111,112.039 ccw(c55.623,112.039) pad.8@53.846,110.263 ; 53.658,110.451 cw(c51.665,108.458) pad.8@54.484,108.458 ; pad.1@53.784,104.376 cw(c55.117,104.034) 55.117,105.41 ; 53.795,112.293 ccw(c53.795,111.305) 53.096,112.004 cw(c55.082,110.018) 55.082,112.827 ; 53.912,106.248 ccw(c53.912,107.149) 54.549,106.512 ccw(c53.179,107.883) 55.117,107.883 ; pad.8@54.304,110.541 ccw(c56.081,110.541) 54.825,109.285 ; pad.8@54.498,108.423 cw(c53.005,106.929) 55.117,106.929 ; pad.8@54.554,106.437 cw(c53.656,105.285) 55.117,105.285 ; pad.8@54.62,106.512 ccw(c55.257,107.149) 55.257,106.248 ; 54.69,101.2 55.117,101.628 55.117,104.395 ; 54.801,112.293 cw(c54.801,111.392) 55.438,112.029 ; 55.245,101.719 cw(c58.835,101.719) 56.296,104.257 ccw(c57.917,102.637) 55.625,102.637 ; 55.284,104.647 cw(c55.284,103.315) pad.8@56.226,104.257 ; 55.431,112.091 ccw(c54.926,112.406) 55.347,112.827 ; 55.475,112.015 cw(c55.51,110.45) 56.617,111.557 ; 55.625,101.129 cw(c56.327,101.129) pad.8@56.289,101.829 ; 55.625,103.596 ccw(c58.003,103.596) pad.8@56.322,101.915 ; 55.711,106.248 ccw(c55.711,106.976) 56.226,106.461 ccw(c55.527,107.16) 56.515,107.16 ; pad.8@56.066,110.694 ccw(c54.963,111.376) 55.88,112.293 ; pad.8@56.073,110.632 cw(c54.761,109.321) 56.617,109.321 ; pad.8@56.087,110.713 ccw(c55.679,111.557) 56.617,111.557 ; pad.8@56.2,108.493 ccw(c55.195,109.499) 56.617,109.499 ; pad.8@56.211,106.43 cw(c55.117,106.507) 55.117,105.41 ; pad.8@56.213,108.413 cw(c55.887,107.761) 56.617,107.761 ; pad.8@56.216,104.271 ccw(c55.625,103.996) 55.625,104.647 ; pad.8@56.23,104.332 cw(c55.709,104.987) 55.117,104.395 ; pad.8@56.237,101.886 cw(c55.5,101.989) 55.5,101.245 ; pad.8@56.261,106.376 cw(c56.261,105.567) 56.833,106.139 ; pad.8@56.284,108.447 ccw(c57.124,108.255) 56.515,107.645 ; pad.8@56.286,108.458 ccw(c57.694,108.458) 56.698,107.462 ; pad.8@56.296,106.461 ccw(c56.811,106.976) 56.811,106.248 ; pad.8@56.319,101.917 cw(c58.352,104.267) 55.245,104.267 ; 57.319,106.842 56.515,107.645 ; 31.131,110.499 31.131,110.047 31.866,109.312 32.904,109.312 33.219,109.626 37.313,109.626 40.64,112.954 41.656,112.954 ; 41.656,112.954 41.656,112.7 42.993,111.363 pad.5@45.124,111.363 44.194,112.293 ; 41.656,112.954 pad.5@43.534,112.954 44.194,112.293 ; 42.469,112.243 42.52,112.293 ; 42.52,112.293 44.194,112.293 ; 48.666,109.271 51.689,112.293 ; 48.666,109.271 48.666,109.931 51.562,112.827 ; 48.666,109.271 48.87,109.068 50.521,109.068 ; 50.254,109.334 50.521,109.068 ; 50.254,109.334 49.86,109.728 50.927,110.795 pad.8@51.714,110.795 ; 50.254,109.334 pad.8@51.714,110.795 ; 50.521,109.068 50.622,108.966 50.673,108.966 ; 50.521,109.068 50.571,109.068 50.673,108.966 ; 50.673,108.966 51.13,108.966 51.13,109.957 51.714,109.372 ; 50.673,108.966 51.714,107.925 ; 51.562,112.827 55.347,112.827 ; 51.664,112.293 51.689,112.293 ; 51.689,112.293 ccw(c51.689,111.166) 50.838,111.905 cw(c51.689,111.166) 51.689,112.293 ; 51.689,112.293 51.816,112.293 ; 51.714,106.172 51.714,107.925 ; 51.714,106.172 51.791,106.248 52.8,106.248 ; 51.714,107.925 51.714,109.372 ; 51.714,107.925 52.8,106.839 52.8,106.248 ; 51.714,109.372 pad.8@51.714,110.795 ; pad.8@51.714,110.795 51.714,111.1 52.362,111.747 ; 51.765,100 51.816,100.051 ; 51.816,100.051 54.305,100.051 55.5,101.245 ; 51.816,112.293 52.362,111.747 ; 51.816,112.293 pad.8@52.908,112.293 ; 51.943,105.512 pad.1@52.045,105.41 ; 51.943,105.512 51.943,105.41 pad.1@52.045,105.41 ; pad.1@52.045,105.41 pad.1@52.8,105.41 ; pad.1@52.045,105.41 pad.1@52.8,104.655 ; 52.362,111.747 cw(c52.96,111.149) 53.055,111.99 ccw(c52.96,111.149) 52.362,111.747 ; 52.362,111.747 ccw(c53.145,110.964) 52.044,110.851 cw(c53.145,110.964) 52.362,111.747 ; 52.362,111.747 pad.8@52.908,112.293 ; 52.362,111.747 55.117,108.992 55.117,106.248 ; pad.1@52.8,104.655 pad.1@52.8,105.41 ; pad.1@52.8,104.655 52.8,104.6 54.912,104.6 55.117,104.395 ; pad.1@52.8,104.655 52.807,104.647 55.117,104.647 ; pad.1@52.8,105.41 55.117,105.41 ; pad.1@52.8,105.41 52.8,106.248 ; 52.8,106.248 55.117,106.248 ; pad.8@52.908,112.293 55.88,112.293 ; 55.117,104.395 55.245,104.267 ; 55.117,104.395 55.117,104.647 ; 55.117,104.647 55.625,104.647 ; 55.117,104.647 55.117,105.41 ; 55.117,105.41 56.718,105.41 57.14,105.832 ; 55.117,105.41 55.117,106.248 ; 55.117,106.248 pad.8@56.724,106.248 ; 55.347,112.827 55.88,112.293 ; 55.5,101.245 55.904,101.245 55.625,101.524 55.625,104.647 ; 55.88,112.293 56.617,111.557 ; 56.515,107.645 56.515,106.457 pad.8@56.724,106.248 ; 56.617,111.557 56.617,107.874 57.61,106.88 57.61,105.362 57.14,105.832 ; pad.8@56.724,106.248 57.14,105.832 ; pad.8@56.724,106.248 57.353,106.248 57.353,106.045 57.14,105.832 ; pad.8@56.2,108.423 cw(c55.44,107.663) 56.515,107.663 ccw(c55.44,107.663) pad.8@56.2,108.423
ADC: TEMP.2 WIFI-Z_1_1.2 | length 54.4
  Top Layer w0.3: WIFI-Z_1_1.2@56.706,160.702 57.89,160.702 61.9,156.693 68.047,156.693 v1(68.91,157.556) ; WIFI-Z_1_1.2@57.104,160.455 cw(c57.701,159.857) 57.701,160.702 cw(c57.701,161.547) WIFI-Z_1_1.2@57.104,160.949 ; v1@68.71,157.556 cw(c68.227,157.556) 68.569,157.215 cw(c68.91,156.873) v1@68.91,157.356
  Bottom Layer w0.3: v1@68.707,157.556 72.034,157.556 73.457,156.134 73.457,134.315 71.73,132.588 ; v1@68.848,157.415 cw(c69.19,157.073) 69.19,157.556 cw(c69.19,158.039) v1@68.848,157.698 ; v1@69.052,157.415 cw(c69.393,157.073) 69.393,157.556 cw(c69.393,158.039) v1@69.052,157.698
  Bottom Layer w0.8: TEMP.2@71.482,127.197 ccw(c70.885,127.794) 71.73,127.794 ccw(c72.575,127.794) TEMP.2@71.977,127.197 ; TEMP.2@71.73,126.949 71.73,132.588
CE: 
CH_PD: R2.1 WIFI-Z_1_1.3 | length 11.4
  Top Layer w0.3: R2.1@49.45,154.737 50.609,154.737 54.574,158.702 WIFI-Z_1_1.3@56.706,158.702 ; R2.1@49.747,154.489 cw(c50.345,153.892) 50.345,154.737 cw(c50.345,155.582) R2.1@49.747,154.984 ; WIFI-Z_1_1.3@55.095,158.469 ccw(c54.574,158.003) 54.574,158.702 ccw(c54.574,159.401) WIFI-Z_1_1.3@55.095,158.935
CS-W: WIFI-X_1_1.9
CSN: M2.5 R4.2 WIFI-Y_1_1.16 Z2.5 | length 72.9
  Top Layer w0.3: Z2.5@45.314,132.72 46.538,132.72 48.717,134.899 48.717,142.418 50.521,144.221 50.521,146.558 50.241,146.837 ; Z2.5@45.983,132.526 cw(c46.453,132.056) 46.453,132.72 cw(c46.453,133.384) Z2.5@45.983,132.914 ; R4.2@49.45,146.837 50.241,146.837 ; R4.2@49.77,146.615 cw(c50.241,146.228) 50.241,146.837 ; R4.2@49.77,147.06 ccw(c50.241,147.447) 50.241,146.837 ; 51.703,148.299 ccw(c51.362,148.641) v1(51.845,148.641) ; v1@52.045,148.641 cw(c52.842,148.641) 52.278,149.204 ; 69.9,150.698 ccw(c69.9,151.556) WIFI-Y_1_1.16@70.507,150.949 ; 69.918,150.698 cw(c69.918,149.866) WIFI-Y_1_1.16@70.507,150.455 ; WIFI-Y_1_1.16@72.104,150.698 60.757,150.698 59.792,149.733 52.807,149.733 51.867,148.793 51.867,148.463 50.241,146.837 ; 51.362,147.958 ccw(c50.679,148.641) 51.645,148.641 cw(c50.679,148.641) 51.362,147.958
  Top Layer w0.8: M2.5@33.198,148.513 v1(33.198,150.47)
  Bottom Layer w0.3: v1(33.198,150.47) 34.087,151.359 37.338,151.359 40.056,148.641 v1@52.045,148.641 ; v1@33.198,150.67 ccw(c33.198,151.152) 33.539,150.811 ccw(c33.881,150.47) v1@33.398,150.47 ; v1@51.903,148.499 ccw(c51.562,148.158) 51.562,148.641 ccw(c51.562,149.124) v1@51.903,148.782 ; 51.362,148.641 cw(c51.362,148.158) 51.703,148.499 ccw(c51.362,148.158) 51.362,148.641 ; 51.362,148.641 ccw(c51.362,149.124) 51.703,148.782 cw(c51.362,149.124) 51.362,148.641